# Altium PCB Upper.PcbDoc
Units mil, origin at the board's own origin, x right, y up, seen from the top; angles counter-clockwise.
Board outline 1968.5 x 1771.65 mil, 4 copper layers (Top Layer, GND02, PWR03, Bottom Layer), stack 23.756 mil thick; 47 components, 26 nets, 113 pads, 68 vias.
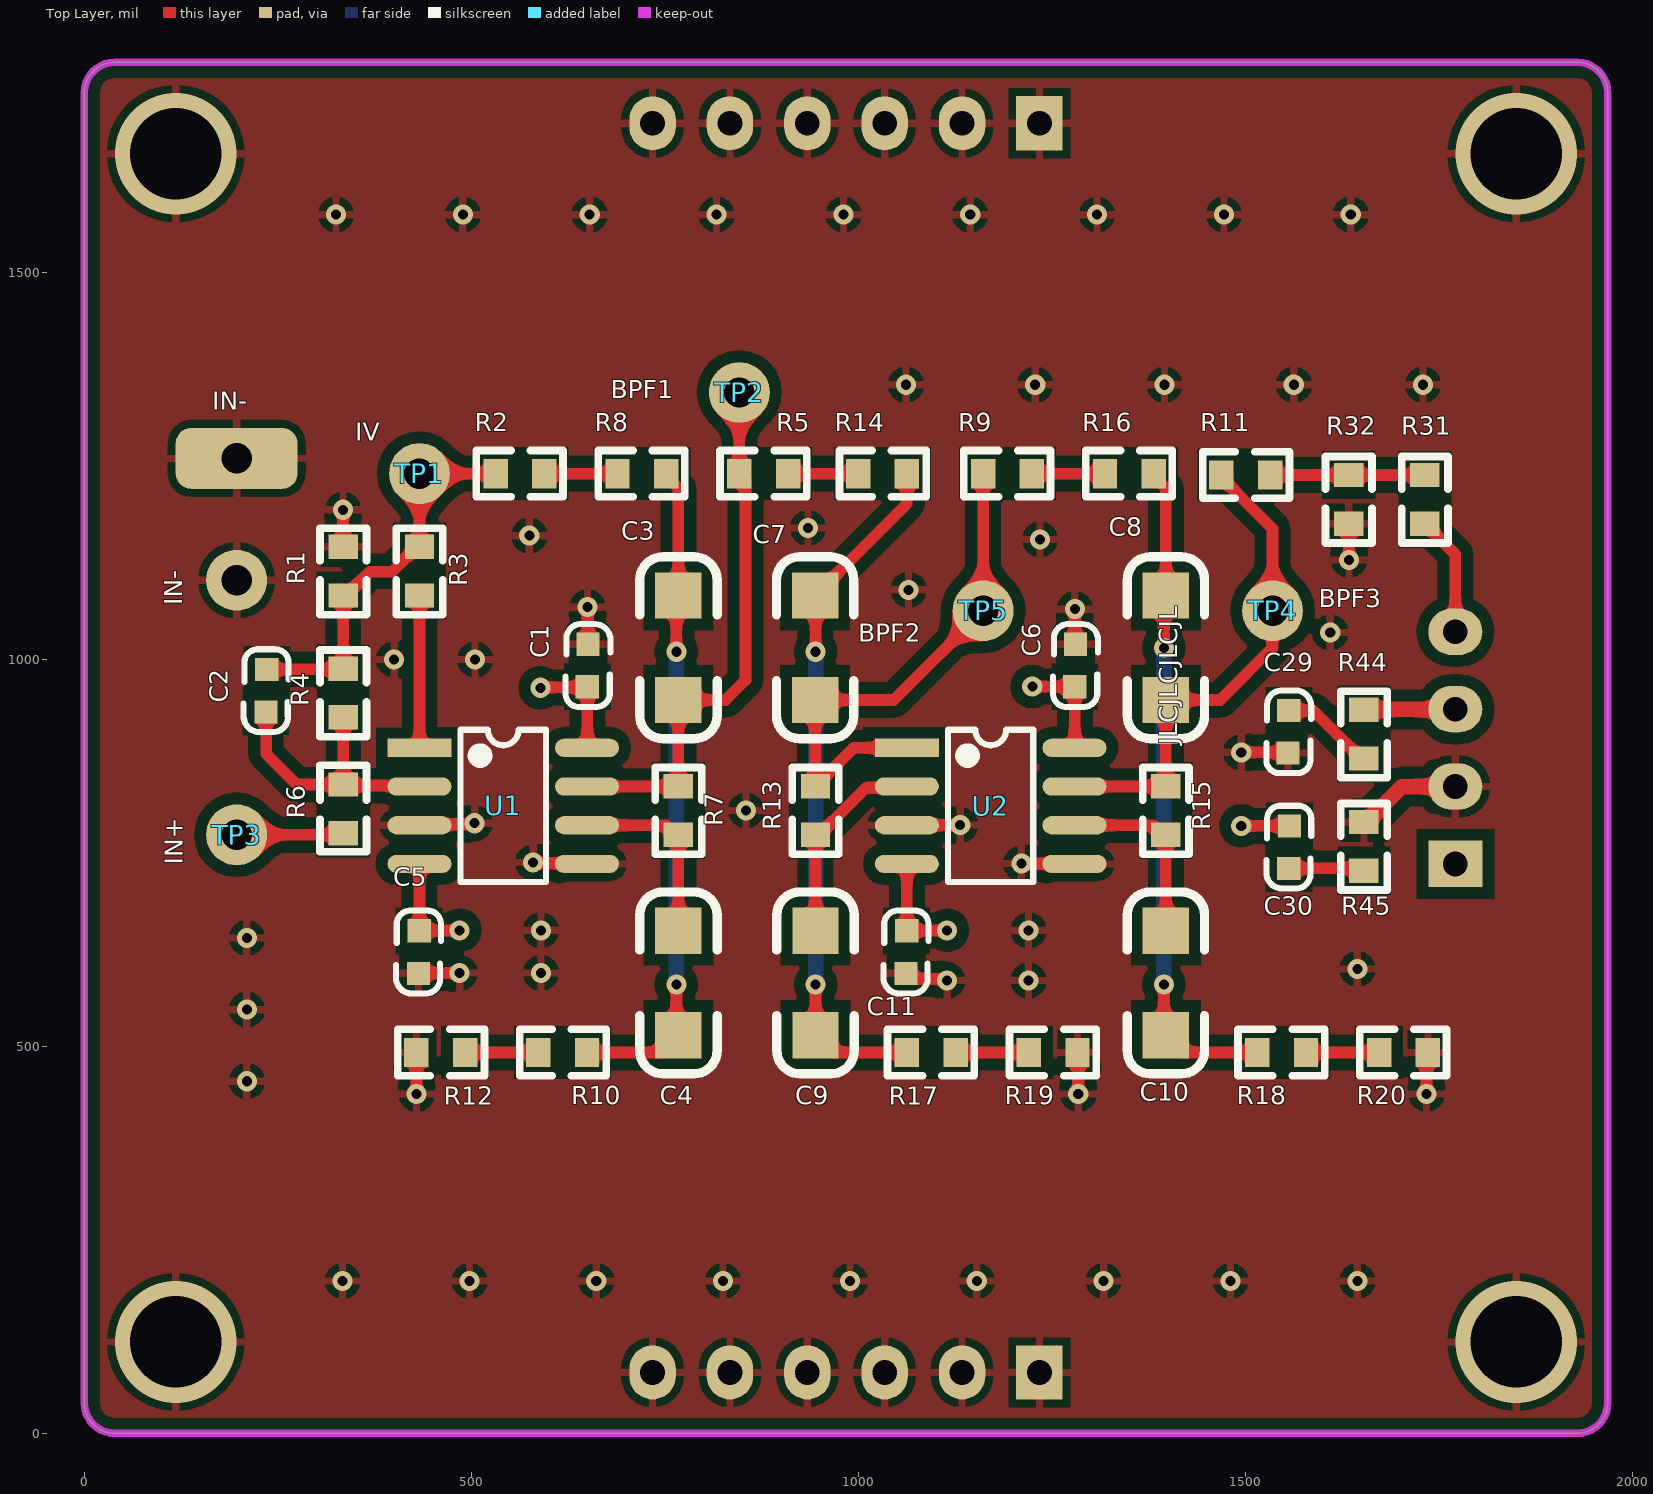
[diagram p0: Top Layer view]
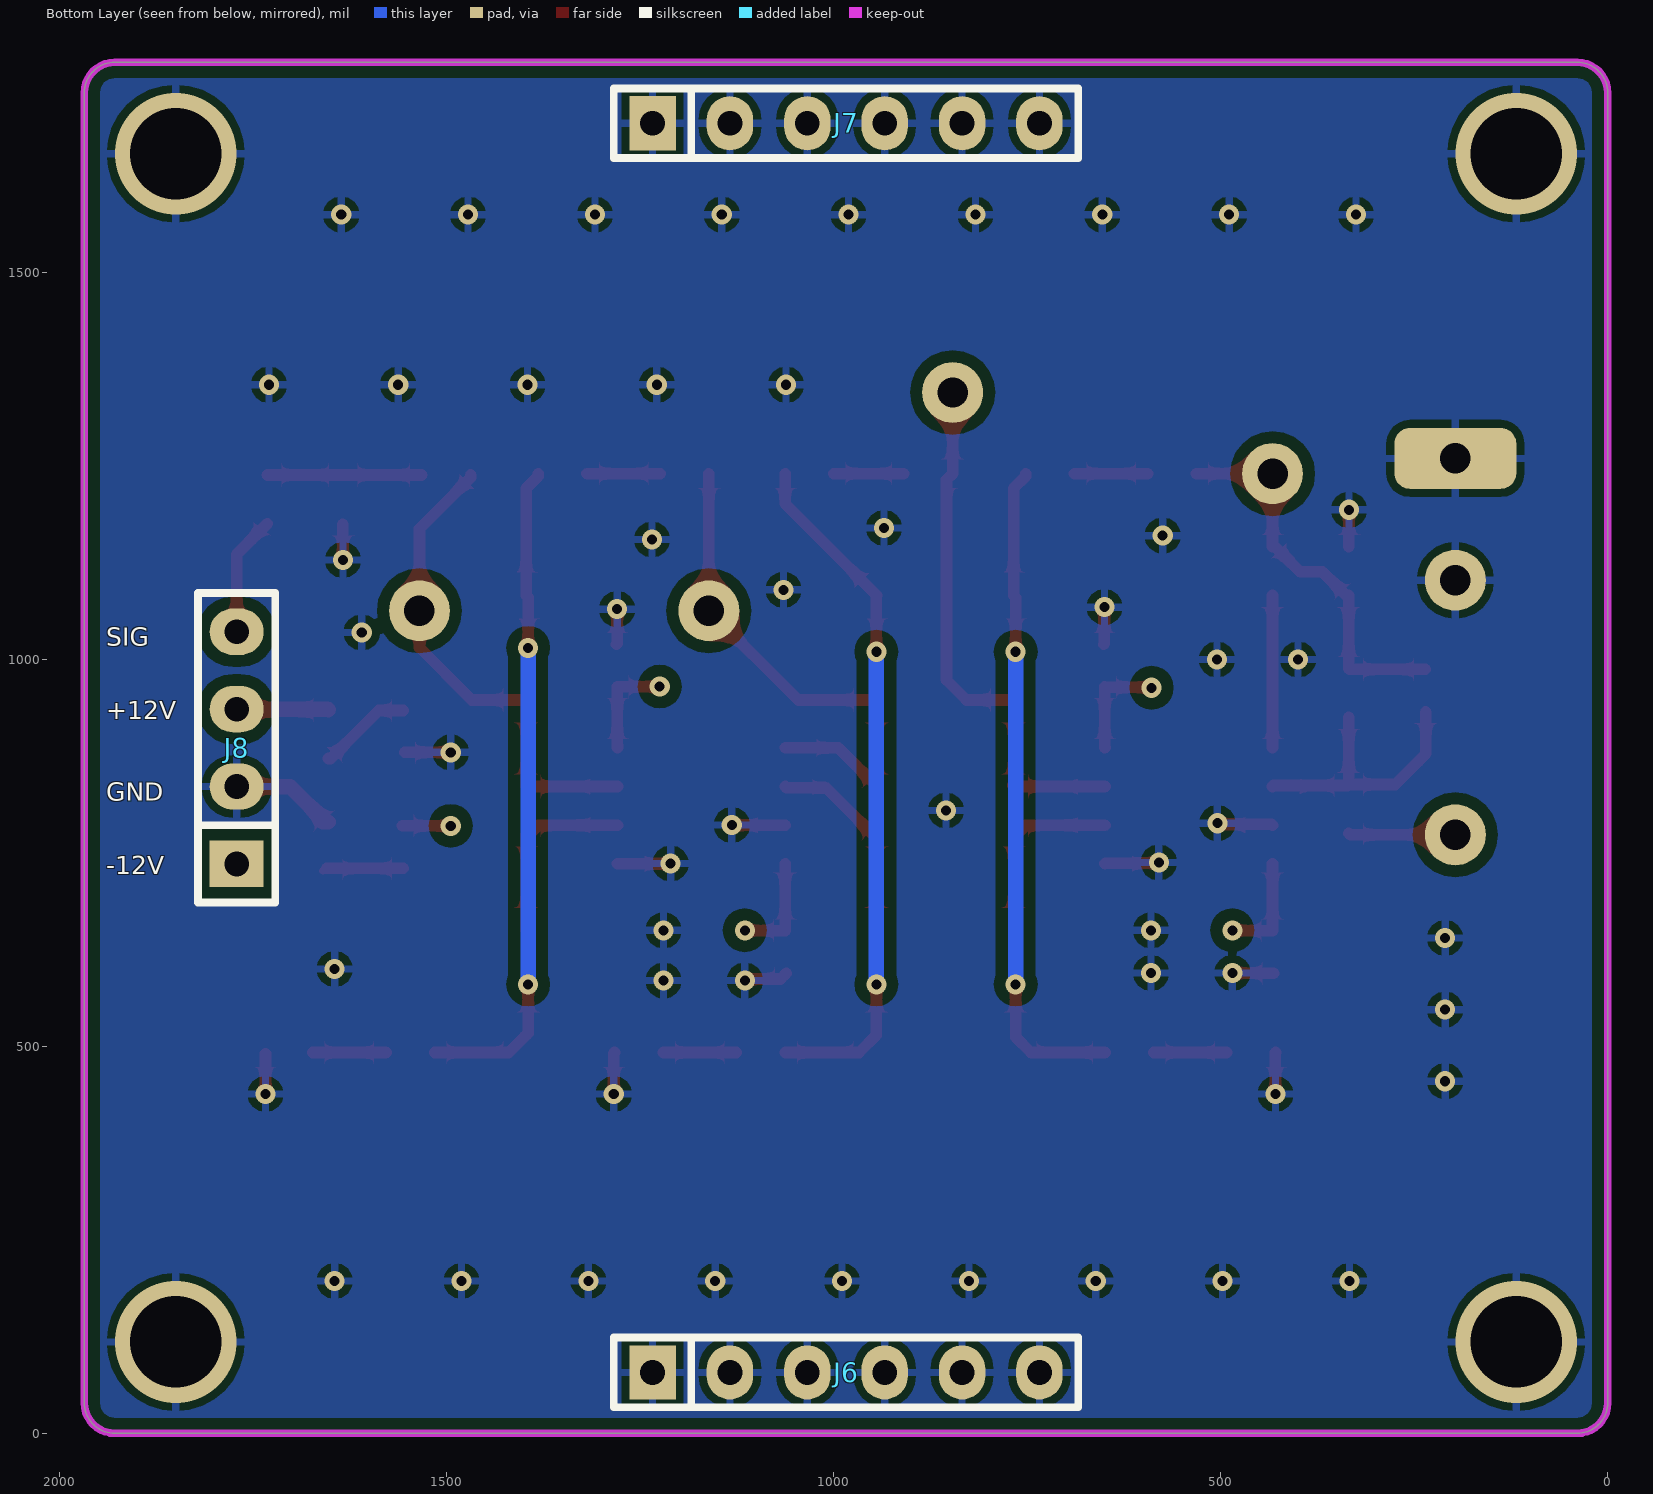
[diagram p1: Bottom Layer view, seen from below]
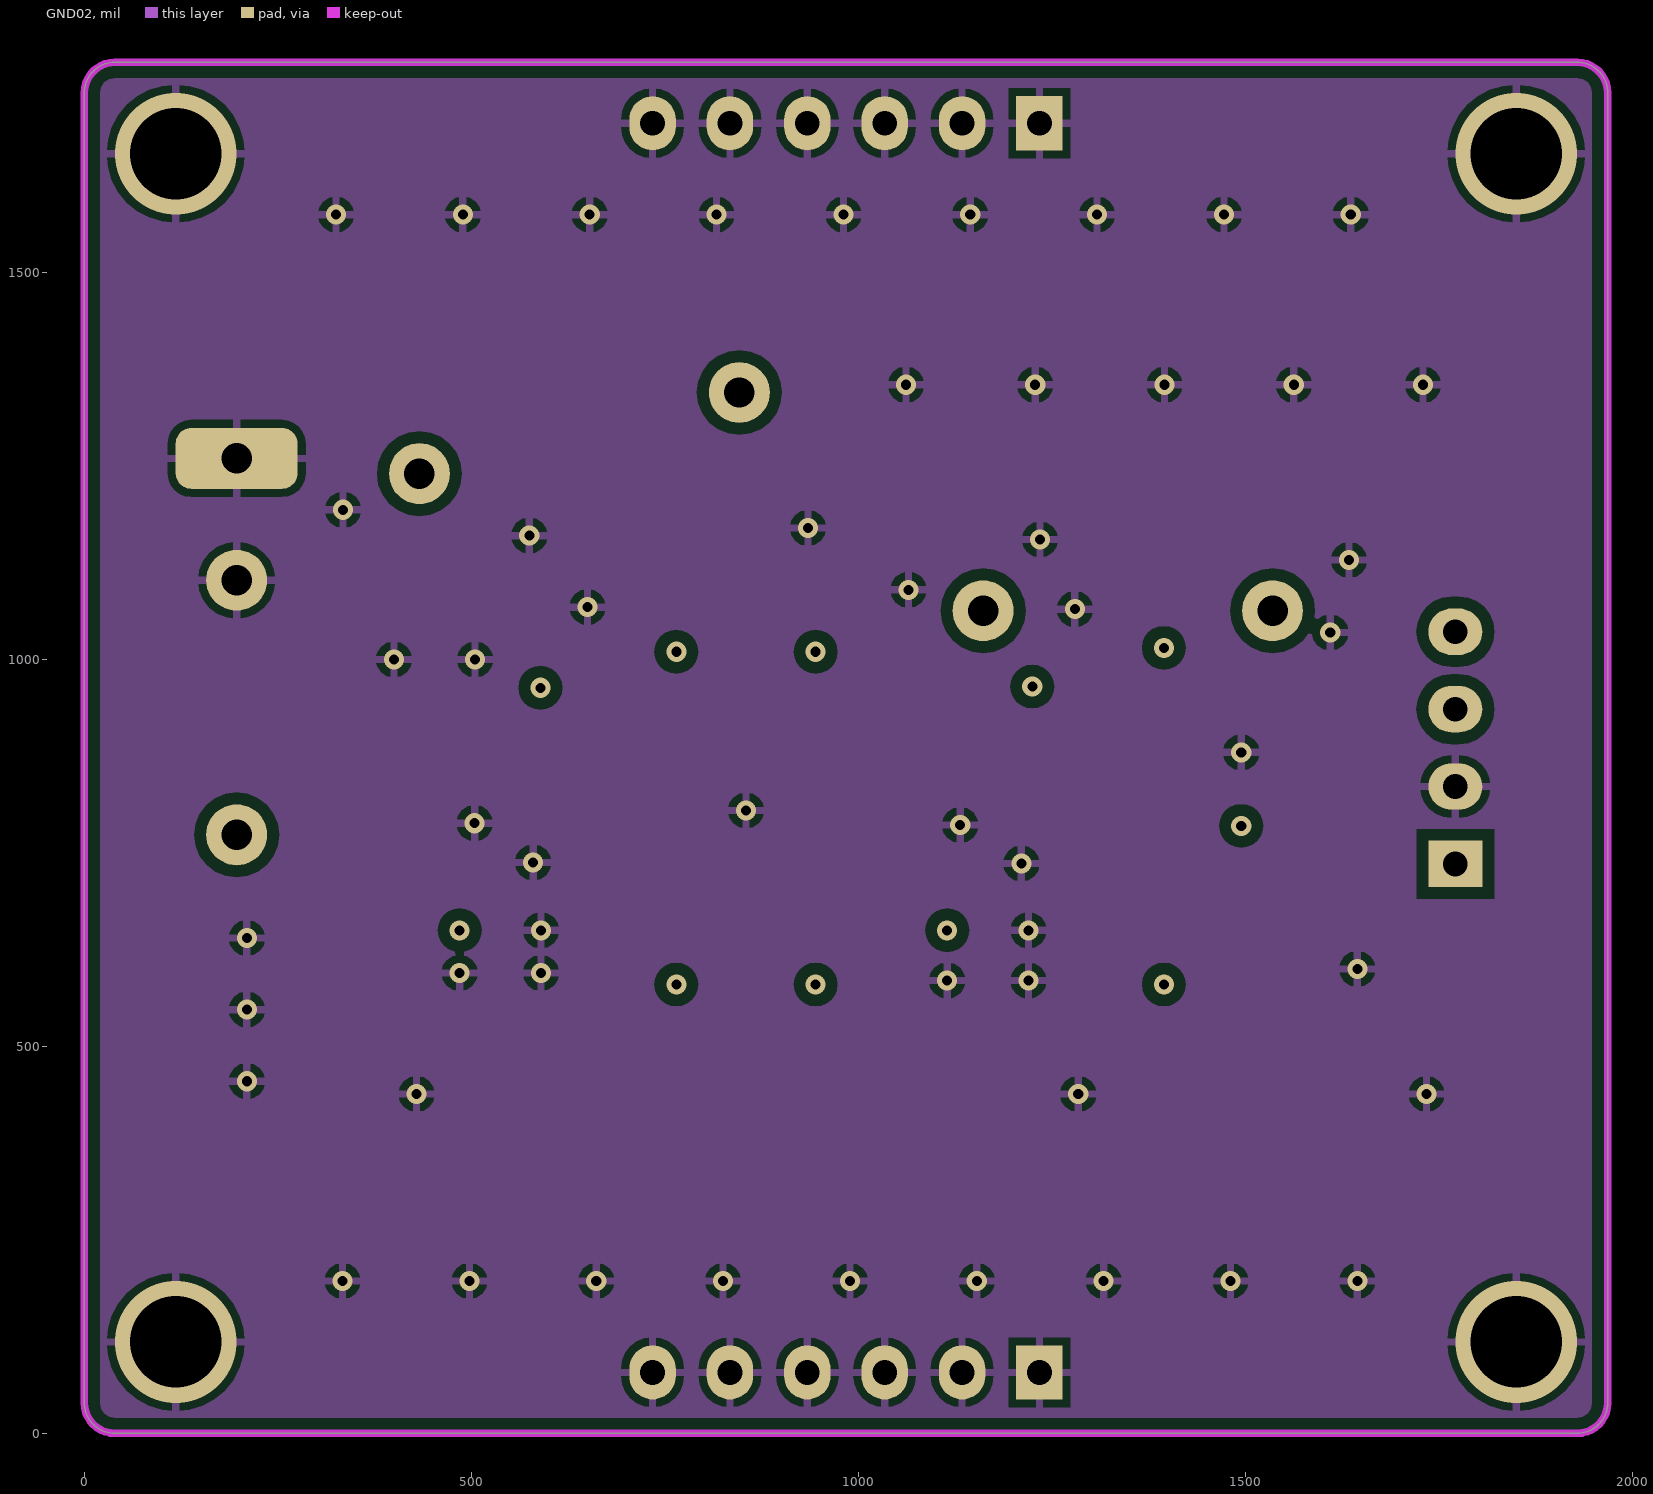
[diagram p2: GND02]
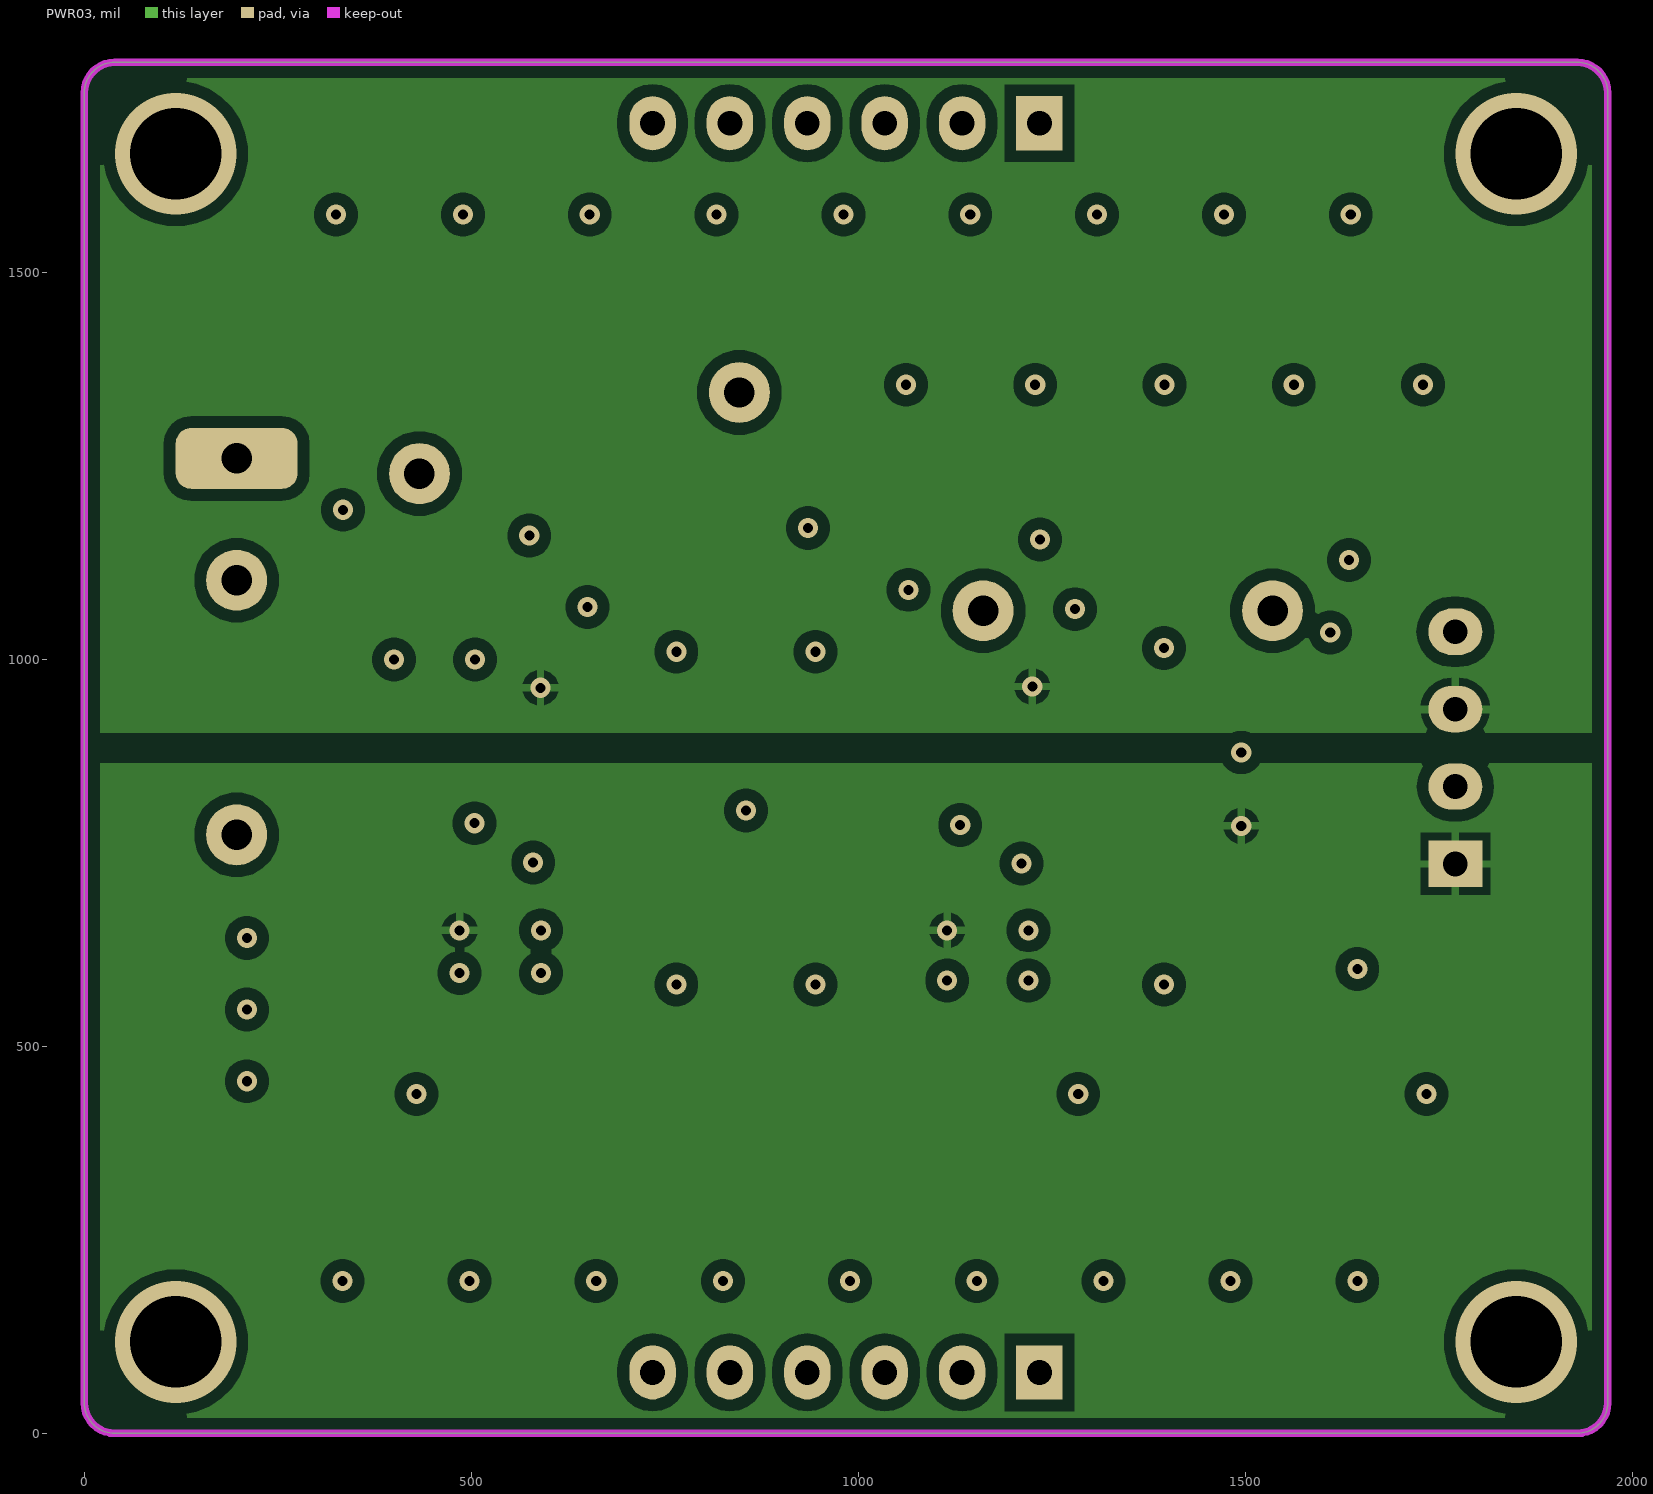
[diagram p3: PWR03]
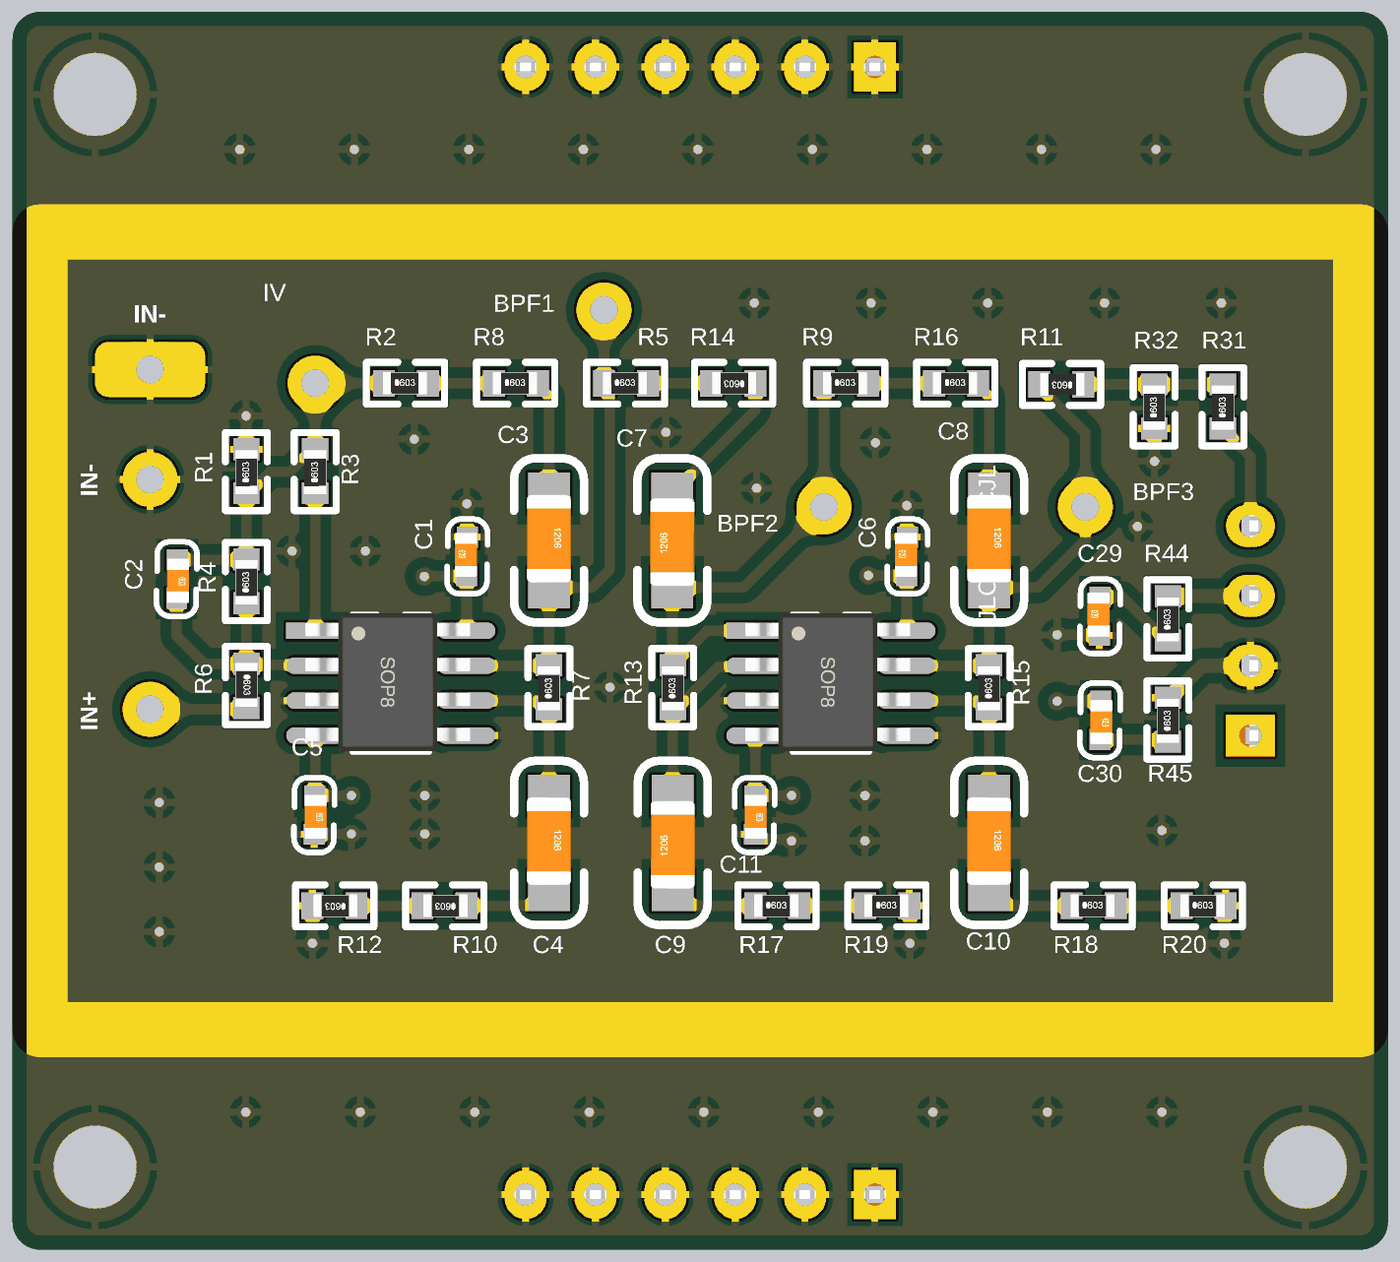
[diagram p4: 3D render of the assembled board from above, using the file's embedded part models]
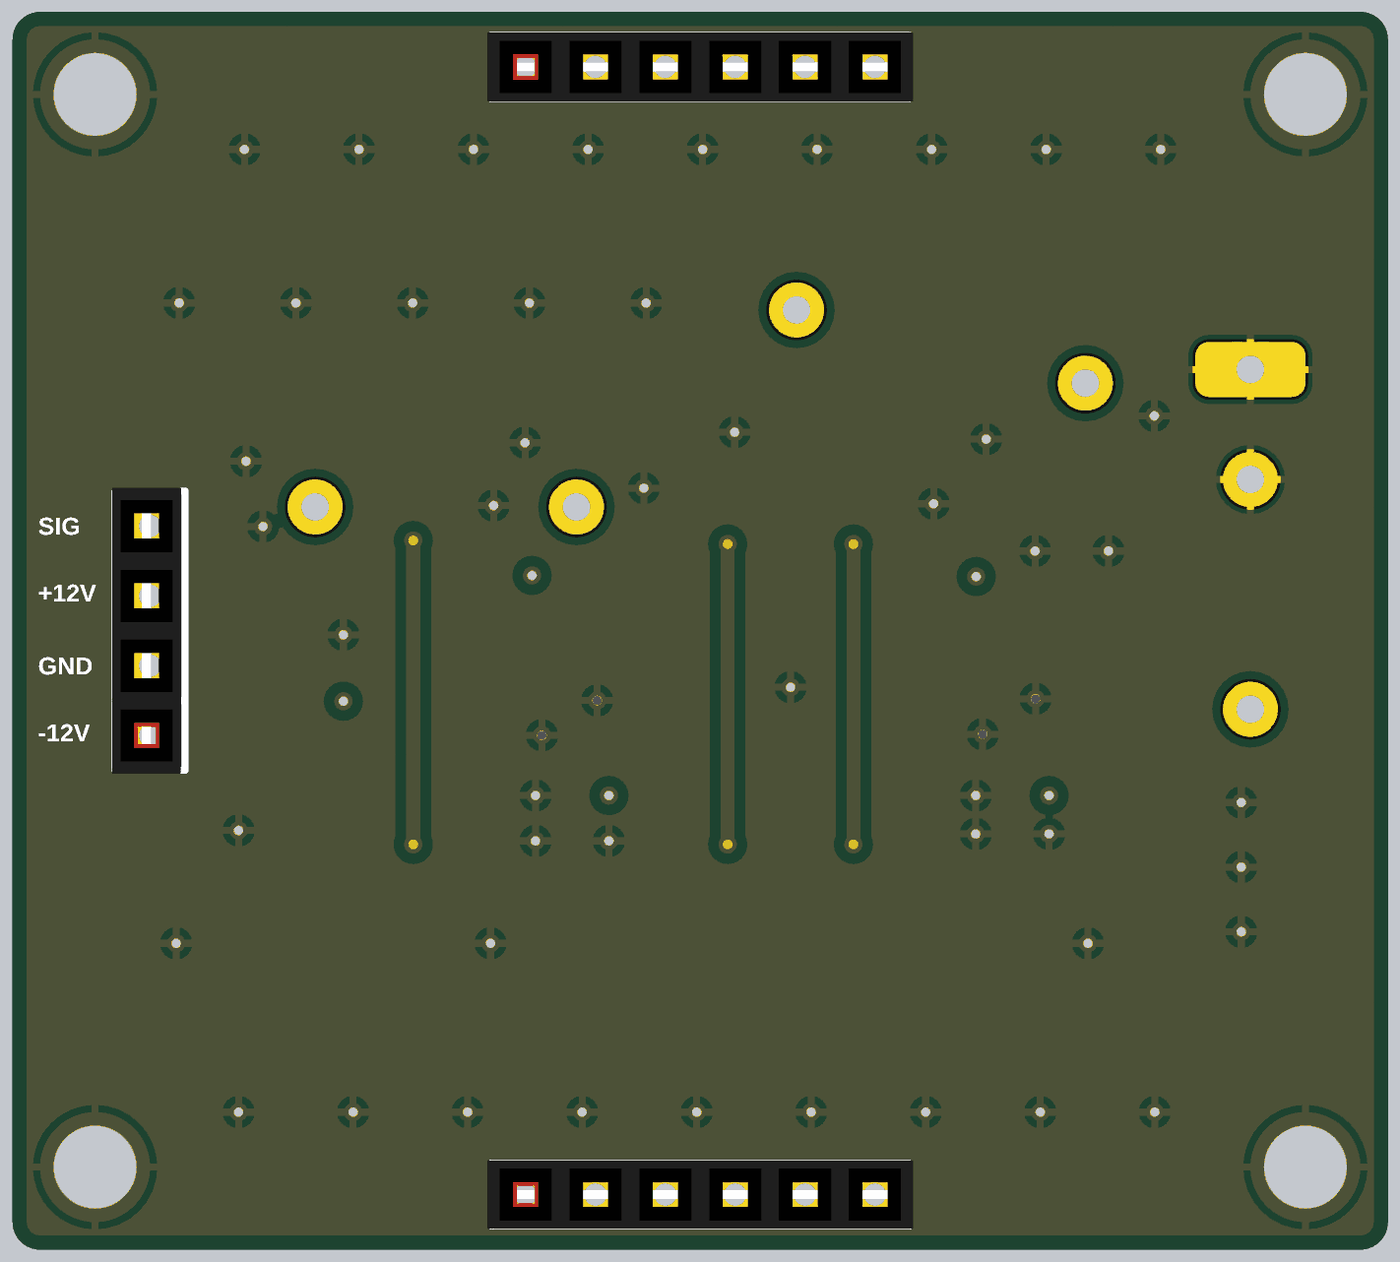
[diagram p5: 3D render of the assembled board from below, using the file's embedded part models]

## Layer stack, top to bottom
Top Solder: solder mask 0.4, Solder Resist, Dk 3.5
Top Layer: signal copper 1.4
Dielectric 2: prepreg 2.8, PP-006, Dk 4.1
GND02: signal copper 1.378
Dielectric 1: dielectric 12.6, FR-4, Dk 4.8
PWR03: signal copper 1.378
Dielectric 3: prepreg 2.8, PP-006, Dk 4.1
Bottom Layer: signal copper 1.4
Bottom Solder: solder mask 0.4, Solder Resist, Dk 3.5

## Board outline
0,39.37 0,1732.28 cw(c39.37,1732.28) 39.37,1771.65 1929.13,1771.65 cw(c1929.13,1732.28) 1968.5,1732.28 1968.5,39.37 cw(c1929.13,39.37) 1929.13,0 39.37,0 cw(c39.37,39.37)

## Design rules (kind name [scope] priority, off if disabled: settings)
Clearance [All] p1: gap=10 ignorepadtopadclearanceinfootprint=FALSE except(0: Arc-Hole Track-Hole SMDPad-Hole THPad-Hole Via-Hole Fill-Hole Poly-Hole Region-Hole Text-Hole; 15: Arc-Fill Arc-Poly Arc-Region Track-Fill Track-Poly Track-Region SMDPad-Fill SMDPad-Poly SMDPad-Region THPad-Fill THPad-Poly THPad-Region Via-Fill Via-Poly Via-Region Fill-Fill Fill-Poly Fill-Region Poly-Poly Poly-Region Region-Region)
DiffPairsRouting [All] p1: maxlimit=100 minlimit=3.5 mostfreqgap=10 toplayer_minwidth=3.5 toplayer_maxwidth=100 toplayer_prefwidth=10 midlayer1_minwidth=3.5 midlayer1_maxwidth=100 midlayer1_prefwidth=10 midlayer2_minwidth=3.5 midlayer2_maxwidth=100 midlayer2_prefwidth=10 bottomlayer_minwidth=3.5 bottomlayer_maxwidth=100 bottomlayer_prefwidth=10 maxuncoupledlength=500
HoleSize [All] p1: absolutevalues=TRUE maxlimit=1181.1 minlimit=11.81 maxpercent=80.000 minpercent=20.000
PolygonConnect [All] p1: connectstyle=Relief reliefconductorwidth=10 reliefentries=4 polygonreliefangle="90 Angle" airgapwidth=10
RoutingVias [All] p1: holewidth=28 width=50 viastyle="Through Hole" minholewidth=11.81 minwidth=19.68 maxholewidth=118.11 maxwidth=196.85
SilkToSilkClearance [All] p1: silktosilkclearance=0
SilkToSolderMaskClearance [IsPad] p1: minsilkscreentomaskgap=0 clearancetoexposedcopper=TRUE
SolderMaskExpansion [All] p1: expansion=4 istentingtop=FALSE
Width [All] p1: maxlimit=100 minlimit=3.5 preferedwidth=10
26 further rules are at their usual default settings.

## Components (designator, comment, footprint, x,y, rotation, side; value= is the part's Value field where it differs from the comment)
C1 "0.1uF" 0603C 649.61,964.57 r90 top
C2 "100pF" 0603C 236.22,987.41 r270 top
C3 "1uF" 1206C 767.72,1082.68 r270 top
C4 "1uF" 1206C 767.72,649.61 r270 top
C5 "0.1uF" 0603C 433.07,649.61 r270 top locked
C6 "0.1uF" 0603C 1279.53,964.57 r90 top
C7 "1uF" 1206C 944.37,947.68 r90 top
C8 "1uF" 1206C 1397.64,1082.68 r270 top
C9 "1uF" 1206C 944.88,514.61 r90 top
C10 "1uF" 1206C 1397.64,649.61 r270 top
C11 "0.1uF" 0603C 1062.99,649.61 r270 top
C29 "0.1uF" 0603C 1555.12,878.86 r90 top
C30 "0.1uF" 0603C 1557.83,785.21 r270 top
J6 "Female HDR1X6" Fe-HDR1X6/2.54-S 1234.25,78.74 r180 bottom
J7 "Female HDR1X6" Fe-HDR1X6/2.54-S 1234.25,1692.91 r180 bottom
J8 "Female HDR1X4" Fe-HDR1X4/2.54-S 1771.65,735.83 r0 bottom locked
R1 "10K" 0603R 334.65,1082.68 r90 top
R2 "0R" 0603R 531.5,1240.16 r0 top
R3 "10K" 0603R 433.07,1082.68 r90 top
R4 "10M" 0603R 334.65,925.2 r90 top
R5 "0R" 0603R 846.46,1240.16 r0 top
R6 "0R" 0603R 334.65,838.43 r270 top
R7 "300K" 0603R 767.72,773.43 r90 top
R8 "3K" 0603R 688.98,1240.16 r0 top
R9 "0R" 0603R 1161.42,1240.16 r0 top
R10 "150R" 0603R 649.61,492.13 r180 top
R11 "9K" 0603R 1532.36,1238.43 r180 top
R12 "70R" 0603R 492.13,492.13 r180 top
R13 "390K" 0603R 944.88,773.43 r90 top
R14 "30K" 0603R 1062.99,1240.16 r180 top
R15 "360K" 0603R 1397.64,773.43 r90 top
R16 "27K" 0603R 1318.9,1240.16 r0 top
R17 "150R" 0603R 1062.99,492.13 r0 top
R18 "100R" 0603R 1515.75,492.13 r0 top
R19 "30R" 0603R 1220.47,492.13 r0 top
R20 "60R" 0603R 1673.23,492.13 r0 top
R31 "0R" 0603R 1732.28,1175.43 r90 top
R32 "1K" 0603R 1633.86,1175.43 r90 top
R44 "10K" 0603R 1653.54,872.01 r90 top
R45 "10K" 0603R 1653.54,727.01 r90 top
TP1 "测试点" TP#1 433.07,1240.16 r0 top
TP2 "测试点" TP#1 846.46,1345 r90 top
TP3 "测试点" TP#2 239.37,773.43 r90 top
TP4 "测试点" TP#3 1496.06,1023.62 r90 top
TP5 "测试点" TP#4 1161.42,1023.62 r90 top
U1 "OPA2140" SOP8 433.07,885.83 r0 top
U2 "OPA2140" SOP8 1062.99,885.83 r0 top

## Footprints (in the part's own frame and the unit in brackets; to place one, negate y for a bottom-side part, rotate by r counter-clockwise, add the part's x,y. Pads: shape width x height; smd on the part's side, far side on the other; paste and mask are expansions set on the pad)
0603C [mil]
  rect 30x30 smd: 1(0.21,-0.35) 2(55.21,-1.35)
  silkscreen extent -26,-30 81,28, body extent -1,-15 62,17, height 12
0603R [mm]
  rect 0.8x0.965 smd: 1(0,0) 2(1.6,0)
  silkscreen extent -0.64,-0.76 2.21,0.76, body extent -0.04,-0.41 1.56,0.41, height 0.45
1206C [mil]
  rect 60x60 smd: 1(0,0) 2(135,0)
  silkscreen extent -50,-50 185,50, body extent 2,-31 128,32, height 39
Fe-HDR1X4/2.54-S [mil]
  rect 70x60 hole 32: 1(0,0)
  oval 70x60 hole 32: 2(0,-100) 3(0,-200) 4(0,-300)
  silkscreen extent -50,-350 50,50, body extent -44,-355 54,55, height 335
Fe-HDR1X6/2.54-S [mil]
  rect 60x70 hole 32: 1(0,0)
  oval 60x70 hole 32: 2(100,0) 3(200,0) 4(300,0) 5(400,0) 6(500,0)
  silkscreen extent -50,-45 550,45, body extent -55,-49 555,49, height 109
SOP8 [mm]
  rect 2.1x0.6 smd: 1(0,0)
  oval 2.1x0.6 smd: 2(0,-1.27) 3(0,-2.54) 4(0,-3.81) 5(5.5,-3.81) 6(5.5,-2.54) 7(5.5,-1.27) 8(5.5,0)
  silkscreen extent 1.35,-4.41 4.15,0.6, body extent -0.36,-4.37 5.64,0.63, height 1.9
TP#1 [mm]
  round 2 hole 1: 1(0,0)
TP#2 [mm]
  round 2 hole 1: 1(0,1.08)
TP#3 [mm]
  round 2 hole 1: 1(1,-1)
TP#4 [mm]
  round 2 hole 1: 1(1,0)

## Part data
C1 C2 C3 C4 C5 C6 C7 C8 C9 C10 C11 C29 C30: library part CAP, "无极性电容"
R1 R2 R3 R4 R5 R6 R7 R8 R9 R10 R11 R12 R13 R14 R15 R16 R17 R18 R19 R20 R31 R32 R44 R45: library part RES
U1 U2: library part NE5532

## Free pads (board coordinates)
  round 78.74 hole 39.37: 6(196.85,1102.36)
  rrect50% 157.48x78.74 hole 39.37: 6(196.85,1259.84)

## Via types
v1: diameter 26, hole 13, Top Layer to Bottom Layer, 55 vias
v2: diameter 25.98, hole 13, Top Layer to Bottom Layer, 9 vias
v3: diameter 157.48, hole 118.11, Top Layer to Bottom Layer, 4 vias

## Nets (pads, with @x,y where several pads share a name; then routed paths per layer and width w, separated by ;. In a path a pad name is that pad's centre, name@x,y a point inside that pad or via, vN(x,y) a via of type N, cw(c..) or ccw(c..) an arc to the next point about the centre after c; other vN are vias at no path point)
+12V: C1.1 C6.1 J8.3 R44.2 U1.8 U2.8 | length 392.8
  Top Layer w15: v1(589.37,963.43) 590.05,964.1 649.28,964.1 C1.1 649.96,886.18 U1.8 ; v1(1225,965) 1225.11,964.89 1279.77,964.89 C6.1 1279.88,889.81 1279.53,889.46 U2.8
  Top Layer w20: R44.2 1653.96,935.41 1771.24,935.41 J8.3
-12V: C5.1 C11.1 C30.1 J8.1 U1.4 U2.4 | length 350.6
  Top Layer w15: U1.4 433.07,649.75 C5.1 433.02,649.7 484.7,649.7 v1(485,650) ; C11.1 C11.1@1062.99,649.75 ; U2.4 C11.1@1062.99,649.75 ; v1(1115,650) 1114.7,649.7 1063.04,649.7 C11.1@1062.99,649.75 ; v1(1495,785) C30.1 ; J8.1@1764.39,728.56 J8.1
BPF1_IN: R2.2 R8.1 | length 94.5
  Top Layer w15: R2.2 R8.1
BPF1_OUT: C3.2 R5.1 R7.2 TP2.1 U1.7 | length 703.2
  Top Layer w15: U1.7 767.13,835.83 R7.2 ; R7.2@768.68,837.38 R7.2 ; TP2.1 R5.1 854.37,1232.24 854.37,973.43 828.62,947.68 C3.2 R7.2
BPF2_IN: R5.2 R14.2 | length 90.6
  Top Layer w15: R5.2 R14.2
BPF2_OUT: C7.1 R9.1 R13.2 TP5.1 U2.1 | length 692
  Top Layer w15: U2.1 994.29,885.83 R13.2 944.37,836.93 C7.1 1046.1,947.68 TP5.1 R9.1
BPF3_IN: R9.2 R16.1 | length 94.5
  Top Layer w15: R9.2 R16.1
BPF3_OUT: C8.2 R11.2 R15.2 TP4.1 U2.7 | length 645.8
  Top Layer w15: U2.7 1397.05,835.83 R15.2 C8.2 1467.68,947.68 1535.43,1015.43 TP4.1 1535.43,1169.11 1469.37,1235.18 R11.2
BPF_OUT: J8.4 R31.1 | length 155.9
  Top Layer w15: R31.1 1771.65,1136.06 J8.4
GND: C1.2 C5.2 C6.2 C11.2 C29.1 J6.1 J6.2 J6.3 J6.4 J6.5 J6.6 J7.1 J7.2 J7.3 J7.4 J7.5 J7.6 J8.2 pad.6 R1.2 R12.2 R19.2 R20.2 R32.1 R45.2 U1.3 U1.5 U2.3 U2.5 | length 937.3
  Top Layer w10: C29.1@1554.54,880 C29.1
  Top Layer w15: v1(334.37,1193.43) 334.37,1145.94 R1.2 ; R12.2 429.37,491.89 v1(429.37,438.43) ; C5.2 432.02,594.7 484.7,594.7 v1(485,595) ; U1.3 434.37,787.13 503.07,787.13 v1(504.37,788.43) ; v1(580.02,737.78) 580.99,736.8 648.63,736.8 U1.5 ; v1(650.17,1067.63) 650.56,1067.23 650.56,1020.18 C1.2 ; C11.2 1068.93,587.1 1112.9,587.1 v1(1115,585) ; U2.3 1063.06,785.9 1131.74,785.9 v1(1131.81,785.97) ; v1(1210.86,736.28) 1211.09,736.05 1279.3,736.05 U2.5 ; v1(1280,1065) 1280,1020.66 C6.2 ; R19.2 1284.37,491.22 v1(1284.37,438.43) ; v1(1495,880) C29.1@1554.54,880 ; v1(1634.37,1128.43) R32.1@1634.37,1174.92 ; v1(1734.37,438.43) R20.2@1734.37,490.28
  Top Layer w20: R45.2 1656.79,790 1702.62,835.83 J8.2 ; R45.2@1660,790 R45.2@1660.12,790.12
  other v1: 210,455 210,547.5 1220,585 590,595 1645,600 210,640 590,650 1220,650 855,805 400,1000 505,1000 1610,1035 1065,1090 1235,1155 575,1160 935,1170 1061.64,1355 1228.73,1355 1395.82,1355 1562.91,1355 1730,1355 325.24,1574.8 489.14,1574.8 653.05,1574.8 816.96,1574.8 980.87,1574.8 1144.78,1574.8 1308.69,1574.8 1472.6,1574.8 1636.5,1574.8
  other v2: 333.73,196.85 497.64,196.85 661.55,196.85 825.46,196.85 989.37,196.85 1153.27,196.85 1317.18,196.85 1481.09,196.85 1645,196.85
  other v3: 118.11,118.11 1850.39,118.11 118.11,1653.54 1850.39,1653.54
IV_IN: R6.2 TP3.1 | length 138.6
  Top Layer w15: TP3.1 332.64,773.43 R6.2
IV_OUT: C2.1 R1.1 R2.1 R3.2 R4.2 TP1.1 | length 511.1
  Top Layer w15: C2.1 333.65,987.2 R4.2 R1.1 337.89,1082.68 368.64,1113.43 397.58,1113.43 429.82,1145.67 R3.2 TP1.1 R2.1
NetC2_2: C2.2 R4.1 R6.1 U1.2 | length 356.7
  Top Layer w15: C2.2 234.87,877.93 244.37,868.43 274.37,838.43 R6.1 ; R4.1 R6.1 ; U1.2 431.77,837.13 335.94,837.13 R6.1
NetC3_1: C3.1 C4.2 R8.2 R10.1 | length 859.5
  Top Layer w15: R10.1 745.24,492.13 765,511.89 v1(765,580) ; R8.2 751.97,1236.91 767.72,1221.16 C3.1 765,1079.96 v1(765,1010)
  Bottom Layer w20: v1(765,580) v1(765,1010)
NetC4_1: C4.1 R7.1 U1.6 | length 247.1
  Top Layer w15: U1.6 752.07,785.83 764.47,773.43 R7.1 C4.1
NetC7_2: C7.2 C9.1 R14.1 R17.1 | length 902.3
  Top Layer w15: v1(945,580) 945,514.49 967.36,492.13 R17.1 ; v1(945,1010) 945,1082.05 C7.2 1062.99,1201.3 R14.1
  Bottom Layer w20: v1(945,580) v1(945,1010)
NetC8_1: C8.1 C10.2 R16.2 R18.1 | length 859.2
  Top Layer w15: R16.2 1381.89,1236.91 1397.64,1221.16 C8.1 1395,1080.04 v1(1395,1015) ; v1(1395,580) 1395,517.24 C10.2 ; C10.2@1399.37,512.87 1420.12,492.13 R18.1
  Bottom Layer w20: v1(1395,580) v1(1395,1015)
NetC9_2: C9.2 R13.1 U2.2 | length 267.8
  Top Layer w15: C9.2 R13.1 949.37,773.43 1010.12,834.18 1061.34,834.18 U2.2
NetC10_1: C10.1 R15.1 U2.6 | length 247.1
  Top Layer w15: U2.6 1381.99,785.83 1394.39,773.43 R15.1 C10.1
NetC29_2: C29.2 R44.1 | length 122.8
  Top Layer w15: C29.2 1588.23,934.07 1650.3,872.01 R44.1
NetC30_2: C30.2 R45.1 | length 105.5
  Top Layer w10: R45.1@1655.31,730 1656.16,730.85 R45.1@1660,727.01
  Top Layer w15: C30.2 R45.1@1655.31,730
NetR3_1: R3.1 U1.1 | length 196.9
  Top Layer w15: U1.1 R3.1
NetR10_2: R10.2 R12.1 | length 94.5
  Top Layer w15: R12.1 R10.2
NetR11_1: R11.1 R31.2 R32.2 | length 199.9
  Top Layer w15: R11.1 R32.2 R31.2
NetR17_2: R17.2 R19.1 | length 94.5
  Top Layer w15: R17.2 R19.1
NetR18_2: R18.2 R20.1 | length 94.5
  Top Layer w15: R18.2 R20.1

## Polygon pours and split planes (outlines as drawn)
+12V on PWR03 "+12V_L03_P008" (solid, pour order 8): 0,1771.65 1968.5,1771.65 1968.5,905.51 0,905.51
-12V on PWR03 "-12V_L03_P007" (solid, pour order 7): 0,0 1968.5,0 1968.5,866.14 0,866.14
GND on Top Layer "GND_L01_P009" (solid, pour order 9): 0,39.37 0,1732.28 cw(c39.37,1732.28) 39.37,1771.65 1929.13,1771.65 cw(c1929.13,1732.28) 1968.5,1732.28 1968.5,39.37 cw(c1929.13,39.37) 1929.13,0 39.37,0 cw(c39.37,39.37)
GND on GND02 "GND_L02_P010" (solid, pour order 10): 0,39.37 0,1732.28 cw(c39.37,1732.28) 39.37,1771.65 1929.13,1771.65 cw(c1929.13,1732.28) 1968.5,1732.28 1968.5,39.37 cw(c1929.13,39.37) 1929.13,0 39.37,0 cw(c39.37,39.37)
GND on Bottom Layer "GND_L04_P011" (solid, pour order 11): 0,39.37 0,1732.28 cw(c39.37,1732.28) 39.37,1771.65 1929.13,1771.65 cw(c1929.13,1732.28) 1968.5,1732.28 1968.5,39.37 cw(c1929.13,39.37) 1929.13,0 39.37,0 cw(c39.37,39.37)

## Keep-outs
Keep-Out Layer:
  the board outline again, w10

## Silkscreen, mask and mechanical layers (free items; w line width, h text height)
Top Overlay:
  text "BPF1" at 680,1330 h40
  text "IN-" at 165,1315 h40
  text "IV" at 350,1275 h40
  text "IN-" at 134.11,1070 h40 r90
  text "BPF3" at 1595,1060 h40
  text "BPF2" at 1000,1015 h40
  text "JLCJLCJLCJL" at 1420,890 h40 r90
  text "IN+" at 135,735 h40 r90
Bottom Overlay:
  text "SIG" at 1940,1010 h40
  text "+12V" at 1940,915 h40
  text "GND" at 1940,810 h40
  text "-12V" at 1940,715 h40
Top Solder:
  lines w78.74: 39.37,314.96 1929.13,314.96 1929.13,1456.69 39.37,1456.69 39.37,314.96